# EAGLE board eeg2 (EAGLE 7.6.0)

Size 56.82 x 45.71 mm. Coordinates in mm from the lower left corner, seen from the top.
Outline: 0,0 56.82,0 56.82,45.71 0,45.71 0,0
Copper layers (1*16): Top 0.035mm / dielectric 1.5mm / Bottom 0.035mm
Design rules "default": minimum track width 10mil, minimum drill 24mil, track to track 8mil, track to pad 8mil, pad to pad 8mil, via to via 8mil, smd to smd 8mil, copper to edge 40mil, drill to drill 8mil, minimum pad ring 10mil, minimum via ring 8mil, stop-mask expansion 4mil, vias tented up to drill 0mil, thermal gap 10mil

## Footprints (pad centres in the part's own frame; a part is rotated, then mirrored left to right if it is on the bottom)
C0805 = smd 1.3 x 1.5: 1 -0.95,0; 2 0.95,0
SOT23 = smd 1 x 1.4: 1 -0.95,-1.1; 2 0.95,-1.1; 3 0,1.1
R0805 = smd 1.3 x 1.5: 1 -0.95,0; 2 0.95,0

## Placement (x,y rotation side)
C1  4.7n  [C0805]  12.7,29.21 0 top
C2  10µ  [C0805]  34.29,35.56 0 top
C3  100n  [C0805]  33.02,22.86 0 top
C4  470n  [C0805]  26.67,22.86 0 top
C5  100µ  [C0805]  12.7,16.51 0 top
C6  100n  [C0805]  20.32,22.86 0 top
J1  2N4393  [SOT23]  31.75,8.89 0 top
R1  3.3K  [R0805]  25.4,16.51 0 top
R2  100K  [R0805]  17.78,8.89 0 top
R3  100K  [R0805]  31.75,16.51 0 top
R4  10K  [R0805]  27.94,29.21 0 top
R5  15K  [R0805]  22.86,29.21 0 top
R6  15K  [R0805]  17.78,29.21 0 top
R7  1MEG  [R0805]  24.13,8.89 0 top
R8  2.2K  [R0805]  19.05,16.51 0 top
R9  2K  [R0805]  29.21,35.56 0 top
R10  10K  [R0805]  15.24,22.86 0 top
R11  10K  [R0805]  33.02,29.21 0 top

## Library data of the parts
C1 C3-C6 J1 R1-R11 = sym
C2 = sym; VALUE2: AC AC 1

## Nets
0: C4.1 R2.2 R8.2 R10.2 R11.2
N$1: C3.2
N$3: C4.2 R5.1 R6.2 R7.2
N$4: C1.1 C5.1 R7.1
N$5: C1.2 R6.1
N$7: C6.2 J1.2 R9.2
N$8: R1.1
N$9: C2.2
N$10: C2.1 R5.2
N$11: C6.1 R8.1
N$12: C3.1 J1.1 R10.1
N$13: R1.2
N$14: R4.1
N$15: R4.2
N$19: R2.1 R3.1
N$21: C5.2 J1.3 R11.1

## Tracks (layer width: path | path; a pad name or v marks a point on that pad's centre or on a via)
0  (4 unrouted)
N$3  (3 unrouted)
N$4  (2 unrouted)
N$5  (1 unrouted)
N$7  (2 unrouted)
N$10  (1 unrouted)
N$11  (1 unrouted)
N$12  (2 unrouted)
N$19  (1 unrouted)
N$21  (2 unrouted)